# Altium PCB PCB1.PcbDoc
Units mil, origin at the board's own origin, x right, y up, seen from the top; angles counter-clockwise.
Board outline 2606.03 x 1134.03 mil, 2 copper layers (Top Layer, Bottom Layer); 13 components, 14 nets, 55 pads, 8 vias.
Unrouted connection lines stored in the file: 8.
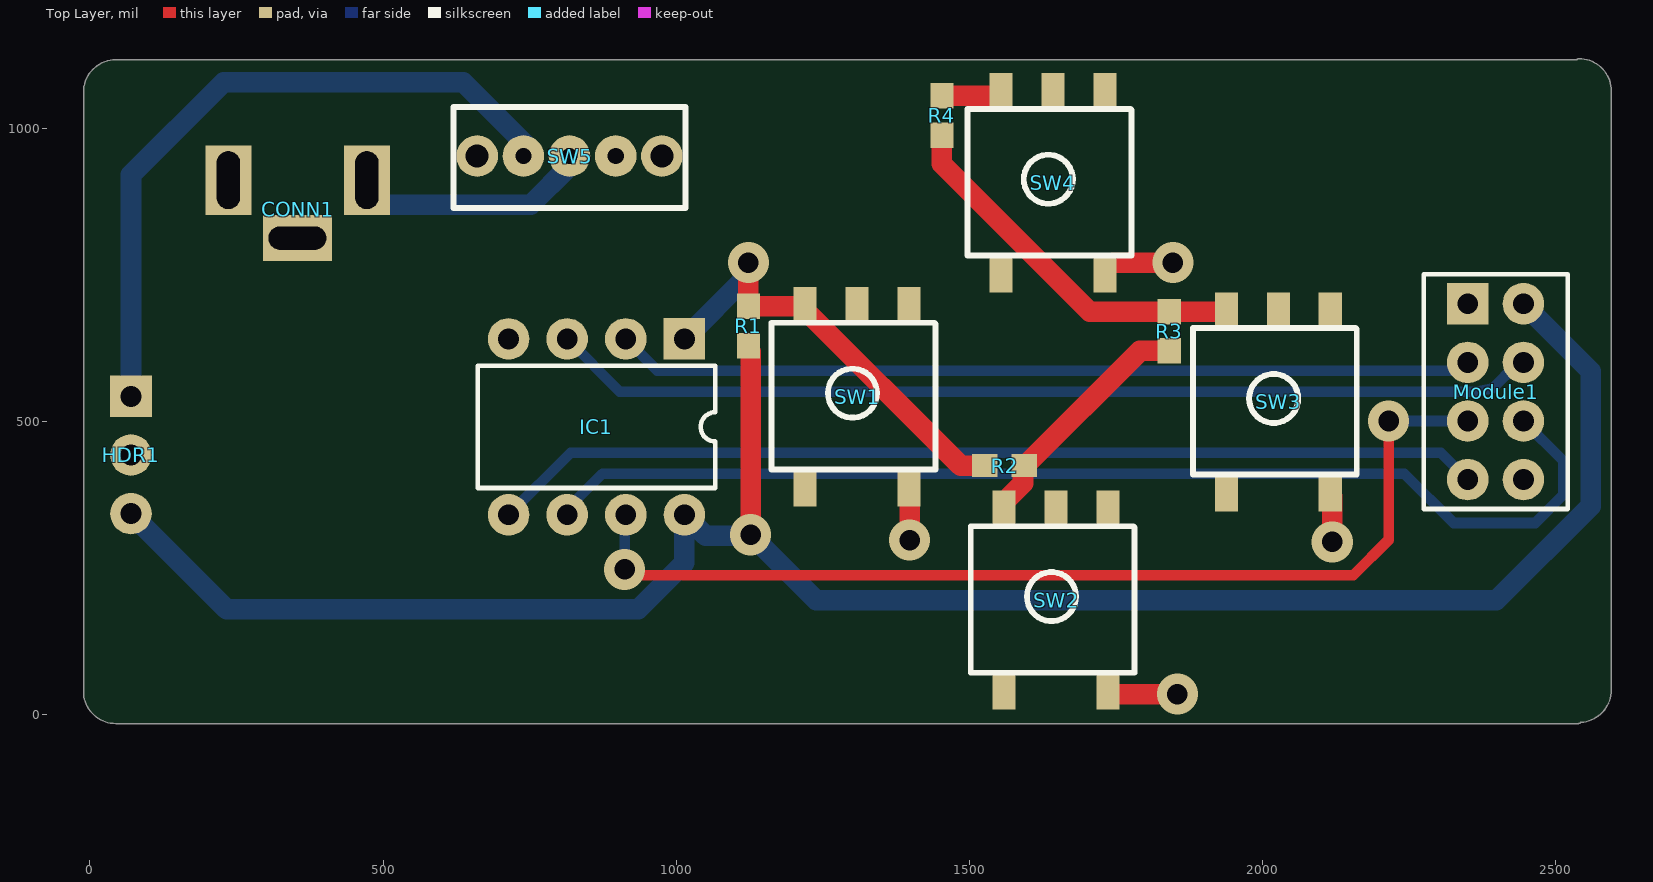
[diagram p0: Top Layer view]
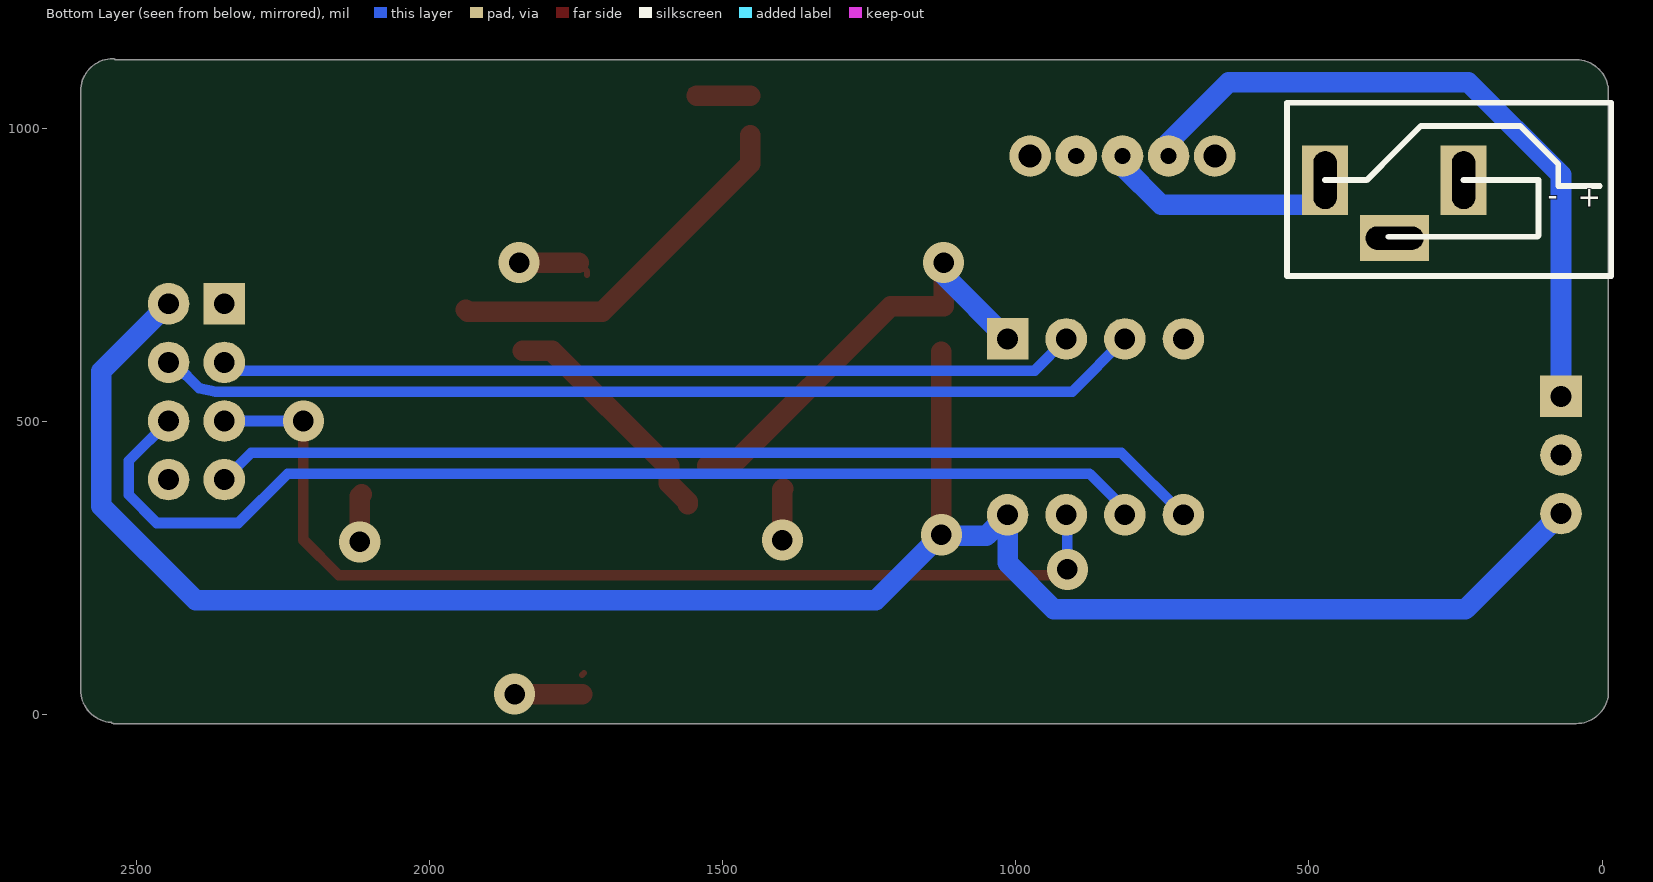
[diagram p1: Bottom Layer view, seen from below]
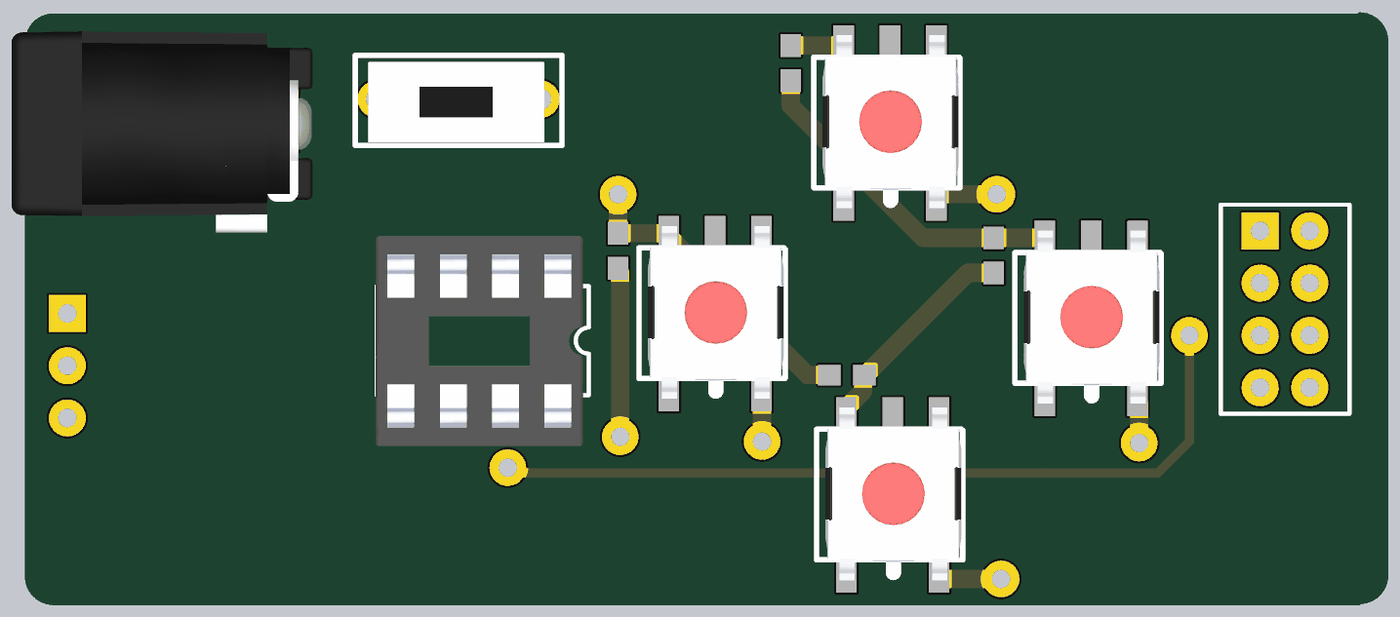
[diagram p2: 3D render of the assembled board from above, using the file's embedded part models]

## Layer stack, top to bottom
Top Solder: solder mask 0.4, Solder Resist, Dk 3.5
Top Layer: signal copper 1.4
Dielectric 1: dielectric 12.6, FR-4, Dk 4.8
Bottom Layer: signal copper 1.4
Bottom Solder: solder mask 0.4, Solder Resist, Dk 3.5

## Board outline
-11.02,40 -11.01,1062 cw(c44,1062) 44,1117.02 cw(c44,1112) 44.03,1117.01 2535.99,1117.01 cw(c2540,1114) 2540,1119.01 cw(c2540,1064) 2595.02,1064 cw(c2590,1064) 2595.01,1063.97 2595.01,42 cw(c2540,42) 2543.07,-12.93 cw(c2539,-10) 2539,-15.02 44,-15.02 cw(c44,40)

## Design rules (kind name [scope] priority, off if disabled: settings)
Clearance "Copper Pour" [InPolygon] p1: gap=50 ignorepadtopadclearanceinfootprint=FALSE
Clearance [All] p2: gap=5 ignorepadtopadclearanceinfootprint=FALSE
ComponentClearance [All] p1: gap=0.01 collisioncheckmode=3 verticalgap=0.01 showdistances=FALSE
PolygonConnect [All] p1: connectstyle=Relief reliefconductorwidth=10 reliefentries=4 polygonreliefangle="90 Angle" airgapwidth=10
RoutingVias [All] p1: holewidth=34 width=68 viastyle="Through Hole" minholewidth=1 minwidth=1 maxholewidth=70 maxwidth=70
SolderMaskExpansion [All] p1: expansion=4
Width [All] p1: maxlimit=50 minlimit=10 preferedwidth=10
29 further rules are at their usual default settings.

## Components (designator, comment, footprint, x,y, rotation, side; value= is the part's Value field where it differs from the comment)
CONN1 "DC Jack" "DC JACK" 333,915 r90 top
HDR1 "3V Regulator" "HEADER3 - SIMPLE" 209.33,614.2 r270 top
IC1 "ATTINY85" PDIP-8 864,491 r180 top
Module1 "NRF24L01" HEADER8 2445.39,700.61 r270 top
R1 "1K" 1608[0603] 1123,663 r90 top value="10000 Ohm"
R2 "1K" 1608[0603] 1560,425 r0 top value="10000 Ohm"
R3 "1K" 1608[0603] 1841,654 r90 top value="10000 Ohm"
R4 "10K" 1608[0603] 1453,1022 r90 top value="10000 Ohm"
SW1 "517315R" "PUSH BUTTON" 1219.83,700 r0 top
SW2 "517315R" "PUSH BUTTON" 1559.42,353 r0 top
SW3 "517315R" "PUSH BUTTON" 1938.42,691 r0 top
SW4 "517315R" "PUSH BUTTON" 1554,1064.96 r0 top
SW5 "600029" "SWITCH - SMALL" 818,953 r90 top

## Footprints (in the part's own frame and the unit in brackets; to place one, negate y for a bottom-side part, rotate by r counter-clockwise, add the part's x,y. Pads: shape width x height; smd on the part's side, far side on the other; paste and mask are expansions set on the pad)
1608[0603] [mm] "Chip Capacitor; Body 1.6 x 0.8 mm (LxW typ)"
  rect 1.1x1 smd: 1(-0.85,0) 2(0.85,0)
"DC JACK" [mm] "Conn, Female, DC Jack 6mm hole diameter"
  rect 2x3 hole 1 slot 2.5 at 90 deg: 1(-2.59,-0.53)
  rect 3x2 hole 1 slot 2.5 at 0 deg: 2(-0.08,2.46) 3(-0.08,-3.54)
  body extent -5.51,-5.23 4.26,9.39, height 10.67
"HEADER3 - SIMPLE" [mm] "Shrouded Female header 4-pos"
  rect 1.8x1.8 hole 0.9: 1(1.808,-3.539)
  round 1.8 hole 0.9: 2(4.348,-3.539) 3(6.888,-3.539)
HEADER8 [mm] "Shrouded Female header 8-pos"
  rect 1.8x1.8 hole 0.9: 1(-0.01,-2.42)
  round 1.8 hole 0.9: 2(-0.01,-0.01) 3(2.53,-2.42) 4(2.53,-0.01) 5(5.07,-2.42) 6(5.07,-0.01) 7(7.61,-2.42) 8(7.61,-0.01)
  silkscreen extent -1.28,-4.33 8.88,1.92, body extent -1.28,-4.37 8.88,1.9, height 8
PDIP-8 [mm] "DIP; 8 Leads; Row Spacing 7.62 mm; Pitch 2.54 mm"
  rect 1.8x1.8 hole 0.9: 1(-3.81,-3.81)
  round 1.8 hole 0.9: 2(-1.27,-3.81) 3(1.27,-3.81) 4(3.81,-3.81) 5(3.81,3.81) 6(1.27,3.81) 7(-1.27,3.81) 8(-3.81,3.81)
  silkscreen extent -5.15,-2.65 5.15,2.65, body extent -4.89,-5.08 5.21,5.12, height 5.11
"PUSH BUTTON" [mm] "PB, SMD, elongated 0603 Pads, 5 Pads, 6mm*6mm"
  rect 1x1.5 smd: 1(0,0) 2(4.5,-8) ""(0,-8) ""(2.25,0) ""(4.5,0)
  silkscreen extent -1.45,-7.15 5.65,-0.8, body extent -1.02,-8.14 5.58,0.26, height 3.1
"SWITCH - SMALL" [mm] "SPDT Switch small"
  round 1.8 hole 1: 0(0,4) 0(0,-4)
  round 1.8 hole 0.7: 1(0,2) 2(0,0) 3(0,-2)
  silkscreen extent -2.25,-5.02 2.13,5.02, body extent -6.1,-4.16 1.81,4.4, height 6.51

## Part data
CONN1: library part 600035, "CONN, 6mm Hole Size DC Jack"
HDR1: library part 600032, "HDR, Female 3-position"
IC1: library part 600027, "IC, ATTINY85, PDIP-8"
Module1: library part 600030, "Module, Female HDR 8-Position"
R1 R2 R3 R4: library part 600002, "RES, Through Hole, 10K Ohm, ±1%, 1/2W", Package="Through Hole", Rated Power/Power Dissipation=1/2W, Resistance="10K Ohm", Tolerance=±1%, Type="Thick Film Chip"
SW1 SW2 SW3 SW4: "SW, NKKAB11AH-RO"
SW5: "SW, Small, Through Hole SPDT Switch"

## Via types
v1: diameter 70, hole 35, Top Layer to Bottom Layer, 8 vias

## Nets (pads, with @x,y where several pads share a name; then routed paths per layer and width w, separated by ;. In a path a pad name is that pad's centre, name@x,y a point inside that pad or via, vN(x,y) a via of type N, cw(c..) or ccw(c..) an arc to the next point about the centre after c; other vN are vias at no path point)
3V3: HDR1.3 IC1.8 Module1.2 R1.1 | length 3520.4
  Top Layer w10: R1.1 1120,626.54 R1.1@1127,619.54
  Top Layer w35: v1(1127,307) R1.1@1127,619.54
  Bottom Layer w35: HDR1.3 233,180 935,180 1014,259 IC1.8 1050,305 1125,305 v1(1127,307) 1239,195 2399,195 2560,356 2560,586 Module1.2
attiny_miso: IC1.6 Module1.6 | length 1938.9
  Bottom Layer w18: IC1.6 814,351 872,409 ; 875,411 2242,411 2326,327 2465,327 2513,375 2513,433 Module1.6
attiny_mosi: IC1.5 Module1.7 | length 1699.1
  Bottom Layer w18: IC1.5 820,447 2304.12,447 Module1.7
CE: IC1.2 Module1.3 | length 1464.3
  Bottom Layer w18: IC1.2 968,587 2336.12,587 Module1.3
CSN: IC1.3 Module1.4 | length 1687.1
  Bottom Layer w18: IC1.3 904,551 2364.37,551 2393,557 2432.43,596.43 2440.43,596.43 Module1.4
GND: CONN1.1 CONN1.2 HDR1.2 IC1.4 Module1.1 SW1.2 SW2.2 SW3.2 SW4.2 | length 422.1
  Top Layer w10: SW4.2 1731.17,756.31 SW4.2@1745.85,771 ; SW2.2 SW2.2@1739.62,35 ; 1736.58,71.04 1739.62,68
  Top Layer w35: SW1.2 1398,384.04 v1(1398,298) ; SW2.2@1739.62,35 v1(1855,35) ; SW4.2@1745.85,771 v1(1847,771) ; SW3.2 2119,372.62 v1(2119,295)
IRQ: Module1.8
NetR2_2: R2.2 R3.1 SW2.1 | length 409.6
  Top Layer w35: SW2.1@1559.42,359.21 1559.42,362.84 1591.5,394.92 1591.5,425 R2.2 1595.43,425 1790.97,620.54 R3.1
NetR3_2: R3.2 R4.1 SW3.1 | length 640
  Top Layer w35: R4.1 1453,940 1705.54,687.46 R3.2 1934.88,687.46 SW3.1
NetR4_2: R4.2 SW4.1 | length 104.9
  Top Layer w10: SW4.1@1544.5,1055.46 SW4.1
  Top Layer w35: R4.2 SW4.1@1544.5,1055.46
PB5: IC1.1 R1.2 R2.1 SW1.1 | length 765.7
  Top Layer w35: v1(1123,771) R1.2 1213.53,696.46 1484.99,425 R2.1
  Bottom Layer w35: IC1.1 1123,750 v1(1123,771)
SCK: IC1.7 Module1.5 | length 1763.9
  Top Layer w18: v1(912,248) 922,238 2155,238 2215,298 v1(2215,501)
  Bottom Layer w18: v1(912,248) 912,339 IC1.7 ; v1(2215,501) Module1.5
VCC: CONN1.3 SW5.2 | length 431.8
  Bottom Layer w35: CONN1.3 472.37,870 752,870 818,936 SW5.2
Vin: HDR1.1 SW5.1 | length 1178.8
  Bottom Layer w35: HDR1.1 70,921 228,1079 636.98,1079 739.26,976.72 SW5.1
pads on no net: SW1. SW2. SW3. SW4. SW5.0 SW5.3

## Polygon pours and split planes (outlines as drawn)
no net on Top Layer "no net" (none, remove dead copper, pour order 32): 114,-198
no net on Top Layer "Top Layer-No Net 1" (solid, pour order 10): 44,-188
no net on Bottom Layer "no net" (none, remove dead copper, pour order 26): 44,-188
no net on Bottom Layer "no net" (none, remove dead copper, pour order 24): 134,-188
no net on Bottom Layer "Bottom Layer-No Net 1" (solid, pour order 16): 74,-188
no net on Bottom Layer "Bottom Layer-No Net 2" (solid, pour order 14): 44,-188

## Other copper
Top Layer:
  pour cut-out: 75.16,-188
  pour cut-out: 44,-188

## Silkscreen, mask and mechanical layers (free items; w line width, h text height)
Mechanical 1:
  lines w10: 2539,-10 44,-10 cw(c44,40) -6,40 -6,1062 cw(c44,1062) 44,1112 2540,1112 ; 2540,-8 ccw(c2540,42) 2590,42 2590,1064 ccw(c2540,1064) 2540,1114

## Text inside footprints (layer, text, board x,y; h text height)
CONN1: Bottom Overlay "-" at 92.45,856.73 h60; Bottom Overlay "+" at 41.27,854.76 h60